# Altium PCB PCB_main_SAFMR.PcbDoc (part 2 of 3)
Units mm, origin at the board's own origin, x right, y up, seen from the top; angles counter-clockwise.
Board outline 128.65 x 96.9 mm, 4 copper layers (Top Layer 1, Top Layer, Bottom Layer, Bottom Layer 1), stack 0.603 mm thick; 100 components, 147 nets, 534 pads, 161 vias.
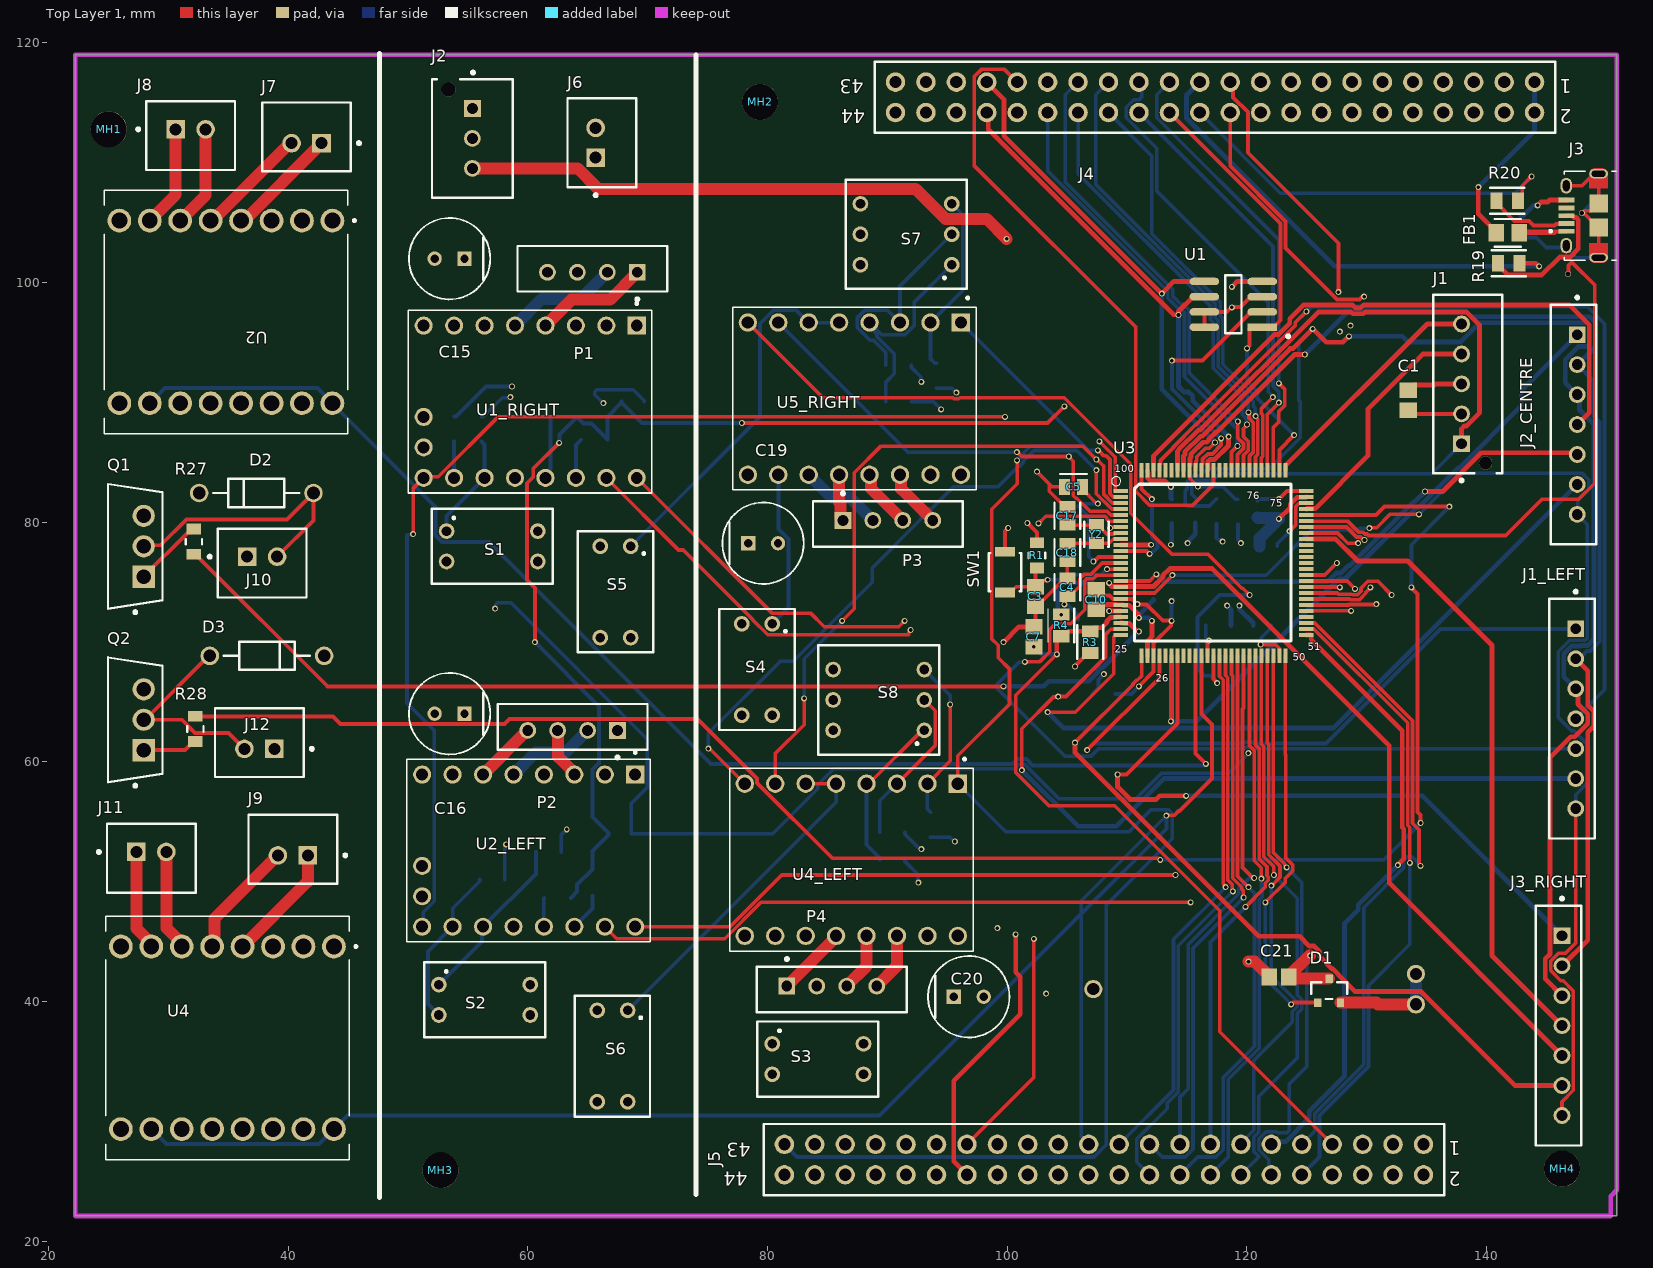
[diagram p0: Top Layer 1 view]

## Via types
v1: diameter 0.5, hole 0.3, Top Layer 1 to Bottom Layer 1, 159 vias
v2: diameter 0.5, hole 0.4, Top Layer 1 to Bottom Layer 1, 2 vias

## Nets (pads, with @x,y where several pads share a name; then routed paths per layer and width w, separated by ;. In a path a pad name is that pad's centre, name@x,y a point inside that pad or via, vN(x,y) a via of type N, cw(c..) or ccw(c..) an arc to the next point about the centre after c; other vN are vias at no path point) (continued)
GND: (continued)
  Bottom Layer 1 w0.3: R5.1@53.848,88.807 53.998,88.807 56.504,91.313 v1(58.674,91.313) ; R6.1@56.134,88.807 56.284,88.807 57.863,90.386 58.509,90.386 v1(58.547,90.424) ; R7.1@58.073,50.165 v1@58.073,52.993 ; R8.1@62.772,52.451 62.772,53.882 v1(63.246,54.356) ; R13.1@91.474,51.816 91.474,51.666 92.545,50.595 92.545,49.949 v1(92.583,49.911) ; R16.1@91.474,54.102 91.474,53.952 92.683,52.743 92.799,52.743 v1(92.837,52.705) ; R12.1@91.982,90.043 93.853,90.043 v1(94.488,89.408) ; R14.1@91.982,93.091 91.982,92.941 92.799,92.124 92.799,91.732 v1(92.837,91.694) ; R17.1@93.599,53.687 95.23,53.687 95.577,53.34 v1(95.631,53.34) ; R15.1@94.107,91.152 95.411,91.152 v1(95.758,90.805)
  Bottom Layer 1 w0.4: v1(112.078,71.755) 111.824,72.009 v1(110.998,72.009) 111.017,72.028 111.017,72.27 112.205,73.458 C14.1@112.205,73.533 ; v1(113.665,78.105) 113.665,78.132 113.728,78.195 C11.1@113.728,79.883 ; v1(113.665,82.931) 113.665,81.978 C6.1@113.728,81.915 ; v1(115.062,78.232) 115.062,78.259 115.189,78.386 115.189,78.486 115.697,78.994 R2.1@115.697,79.942 ; v1(118.364,73.025) 118.364,72.998 118.686,72.676 R9.1@118.686,71.374 ; v1(119.38,73.025) 119.38,72.729 120.535,71.574 C8.1@120.535,71.374 ; R18.2@142.875,105.55 143.052,105.55 143.909,106.407 144.253,106.407 v1(144.272,106.426)
  Bottom Layer 1 w1: C9.1@120.904,80.391 120.954,80.341 122.605,80.341 v1(122.682,80.264) 122.607,80.264 122.457,80.114 122.457,80.039 121.068,78.65 121.068,78.003 C2.1@121.043,77.978
NetBT1_1: BT1.1 D1.2 | length 8.9
  Top Layer 1 w1: D1.2@127.823,39.894 130.825,39.894 130.968,39.751 BT1.1@134.11,39.751
  Bottom Layer 1 w1: BT1.1@134.11,39.751 BT1.1@134.11,42.291
NetC2_2: C2.2 U3.73 | length 5
  Top Layer 1 w0.3: v1(123.571,79.248) 124.08,79.757 124.08,81.303 124.347,81.571 124.961,81.571 U3.73@124.971,81.581
  Bottom Layer 1 w0.3: C2.2@122.543,77.978 122.543,78.178 123.571,79.206 v1(123.571,79.248)
NetC4_2: C4.2 U3.13 Y1.1 | length 8.7
  Top Layer 1 w0.3: v1(104.775,73.13) 104.775,73.545 C4.2@105.029,73.799 105.229,73.799 106.067,74.637 106.067,75.277 106.448,75.658 107.013,75.658 107.936,76.581 U3.13@109.471,76.581
  Bottom Layer 1 w0.3: v1(104.775,73.13) 105.018,73.13 105.918,72.23 Y1.1@105.918,71.831
NetC5_2: C5.2 U3.12 Y1.2 | length 11.3
  Top Layer 1 w0.3: C5.2@106.287,82.931 106.287,82.731 107.447,81.571 107.529,81.571 v1(107.567,81.532) ; v1(107.188,76.708) 107.242,76.708 107.615,77.081 U3.12@109.471,77.081
  Bottom Layer 1 w0.3: v1(107.188,76.708) 107.188,76.762 106.818,77.132 106.818,80.431 Y1.2@105.918,81.331 106.121,81.534 106.123,81.532 v1(107.567,81.532)
NetC8_2: C8.2 U3.49 | length 4.3
  Top Layer 1 w0.3: v1(121.158,69.781) 122.385,69.781 122.711,69.455 122.711,68.841 U3.49@122.721,68.831
  Bottom Layer 1 w0.3: v1(121.158,69.781) 121.196,69.819 121.196,70.335 122.035,71.174 C8.2@122.035,71.374
NetC15_1: C15.1 U1_RIGHT.7 | length 5.9
  Bottom Layer w1: U1_RIGHT.7@53.848,96.393 53.848,96.53 54.717,97.399 C15.1@54.717,101.981
NetC16_1: C16.1 U2_LEFT.7 | length 5.5
  Bottom Layer w1: U2_LEFT.7@53.721,58.928 53.721,59.065 54.717,60.061 C16.1@54.717,64.008
NetC19_1: C19.1 U5_RIGHT.9 | length 5.7
  Bottom Layer w1: U5_RIGHT.9@78.359,83.947 78.369,83.937 78.369,78.242 C19.1@78.379,78.232
NetC20_1: C20.1 U4_LEFT.9 | length 19.5
  Bottom Layer w1: U4_LEFT.9@78.105,45.466 80.646,42.925 93.005,42.925 C20.1@95.544,40.386
NetD2_2: D2.2 J10.2 Q1.2 | length 22.6
  Top Layer 1 w0.33: Q1.2@27.94,77.978 28.025,78.063 29.36,78.063 31.526,80.229 39.914,80.229 D2.2@42.108,82.423 42.108,80.139 J10.2@39.075,77.106
NetD3_2: D3.2 J12.2 Q2.2 | length 17.1
  Top Layer 1 w0.33: D3.2@33.457,68.834 33.366,68.834 28.032,63.5 Q2.2@27.94,63.5 31.121,63.5 32.218,62.403 35.009,62.403 J12.2@36.342,61.07
NetFB1_2: FB1.2 J3.1 | length 6.9
  Top Layer 1 w0.3: FB1.2@142.778,104.11 142.935,104.267 145.661,104.267
  Top Layer 1 w0.33: FB1.2@142.778,104.11 145.661,104.11 145.783,104.232 146.65,104.232 J3.1@146.685,104.267
NetJ3_2: J3.2 R20.1 | length 6.9
  Top Layer 1 w0.33: R20.1@140.83,106.807 140.83,106.63 142.32,105.14 143.563,105.14 143.943,104.76 145.661,104.76 145.783,104.882 146.65,104.882 J3.2@146.685,104.917
NetJ3_3: J3.3 R19.1 | length 11.7
  Top Layer 1 w0.4: R19.1@140.957,101.6 140.957,101.423 141.761,100.619 144.616,100.619 146.114,102.117 146.981,102.117 147.66,102.796 147.66,105.241 147.484,105.417 147.31,105.417 147.16,105.567 J3.3@146.685,105.567
NetJ3_SH1: J3.SH1 J3.SH2 J3.SH3 J3.SH4 J3.SH5 J3.SH6 R18.1 | length 23
  Top Layer 1 w0.3: J3.SH6@146.66,108.067 147.973,108.067 148.973,109.067 J3.SH4@149.36,109.067 J3.SH2@149.36,106.567 148.76,105.967 148.185,105.967 148.009,105.791 v2(147.955,105.791) 147.993,105.753 148.149,105.753 149.335,104.567 J3.SH3@149.36,104.567 J3.SH1@149.36,102.067
  Bottom Layer 1 w0.3: R18.1@142.875,103.746 144.156,103.746 144.992,102.91 146.503,102.91 J3.SH5@146.66,103.067 146.66,102.892 147.485,102.067 J3.SH1@149.36,102.067 ; v2(147.955,105.791) 149.36,107.196 J3.SH4@149.36,109.067
NetJ7_1: J7.1 U2.4 | length 9.4
  Top Layer 1 w1: U2.4@36.068,105.156 36.319,105.156 J7.1@42.779,111.616
NetJ7_2: J7.2 U2.5 | length 9.4
  Top Layer 1 w1: U2.5@33.528,105.156 33.674,105.156 40.134,111.616 J7.2@40.279,111.616